# Altium PCB Seq.PcbDoc
Units mm, origin at the board's own origin, x right, y up, seen from the top; angles counter-clockwise.
Board outline 232.5 x 115 mm, 2 copper layers (Top Layer, Bottom Layer); 67 components, 53 nets, 354 pads, 0 vias.
Unrouted connection lines stored in the file: 177.
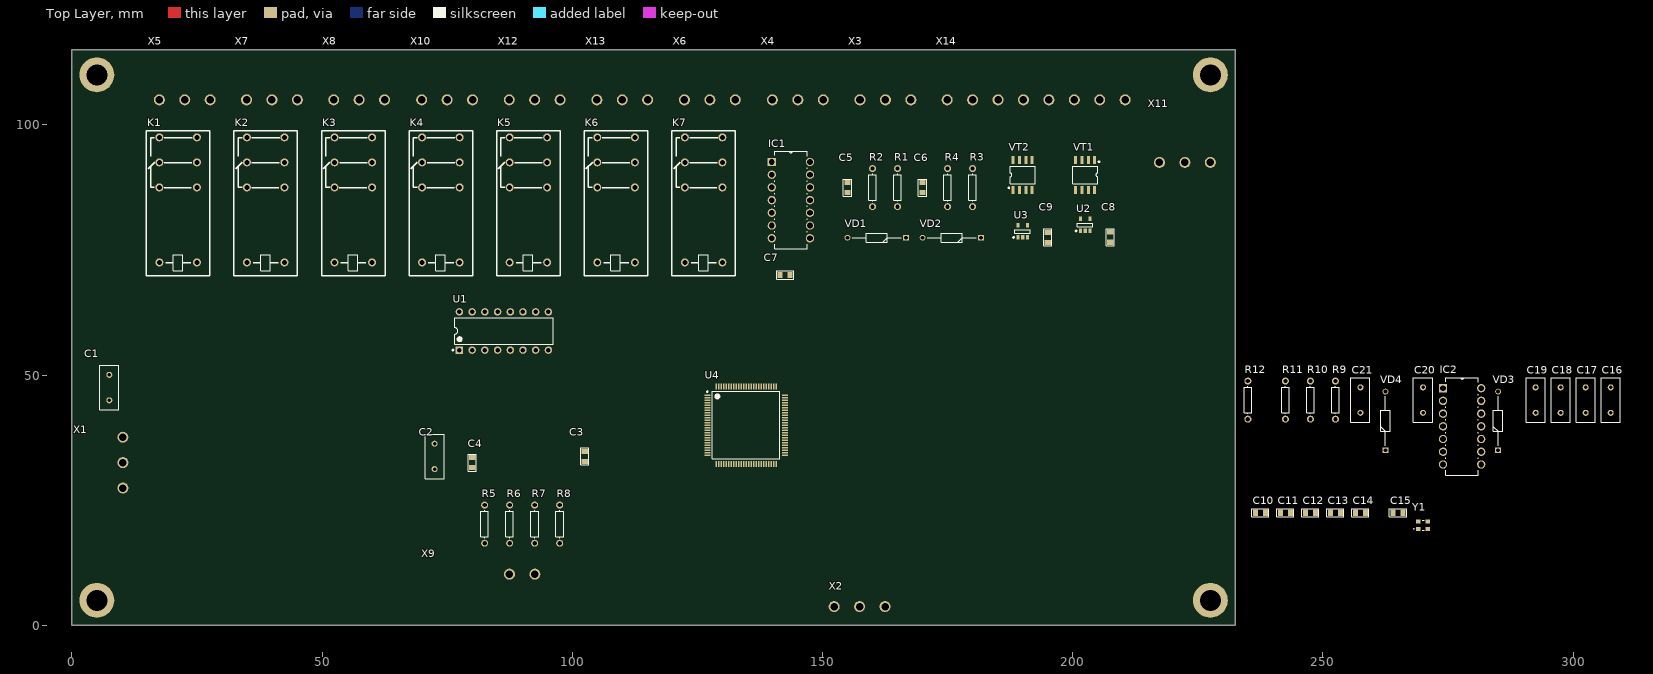
[diagram p0: Top Layer view]
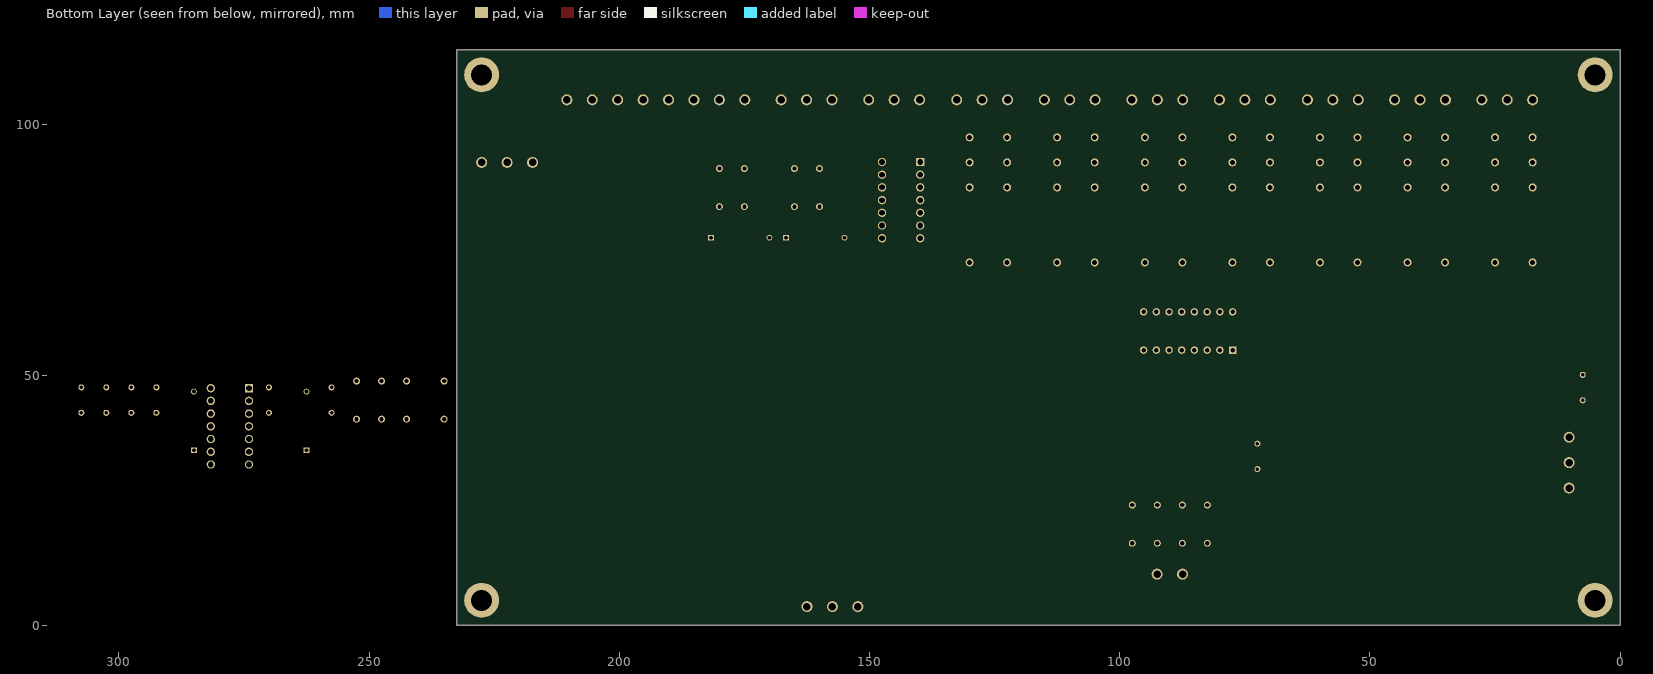
[diagram p1: Bottom Layer view, seen from below]

## Layer stack, top to bottom
Top Solder: solder mask 0.0102, Solder Resist, Dk 3.5
Top Layer: signal copper 0.0356
Dielectric 1: dielectric 0.32, FR-4, Dk 4.8
Bottom Layer: signal copper 0.0356
Bottom Solder: solder mask 0.0102, Solder Resist, Dk 3.5

## Board outline
0,0 232.5,0 232.5,115 0,115

## Design rules (kind name [scope] priority, off if disabled: settings)
Clearance [All] p1: gap=0.254 ignorepadtopadclearanceinfootprint=FALSE except(0: Arc-Hole Track-Hole SMDPad-Hole THPad-Hole Via-Hole Fill-Hole Poly-Hole Region-Hole Text-Hole)
PolygonConnect [All] p1: connectstyle=Direct reliefconductorwidth=0.254 reliefentries=4 polygonreliefangle="90 Angle" airgapwidth=0.254
RoutingVias [All] p1: holewidth=0.711 width=1.27 viastyle="Through Hole" minholewidth=0.711 minwidth=1.27 maxholewidth=0.711 maxwidth=1.27
SolderMaskExpansion [All] p1: expansion=0.102 istentingtop=FALSE
Width [All] p1: maxlimit=5 minlimit=0.1 preferedwidth=0.3
30 further rules are at their usual default settings.

## Classes and differential pairs
component class PTT_In: C16 C17 C18 C19 C20 C21 IC1 IC2 R1 R2 R3 R4 R5 R6 R7 R8 R9 R10 R11 R12 VD1 VD2 VD3 VD4 X12 X13 X14
component class MCU: C3 C4 C5 C6 C7 C8 C9 C10 C11 C12 C13 C14 C15 U4 Y1
component class Relay: C1 C2 K1 K2 K3 K4 K5 K6 K7 U1 U2 U3 VT1 VT2 X1 X2 X3 X4 X5 X6 X7 X8 X9 X10 X11

## Components (designator, comment, footprint, x,y, rotation, side; value= is the part's Value field where it differs from the comment)
C1 "Ceramic capacitor, 0.1μF, X7R, ±10%, 50V, 1206, -55...+125°C" RAD-0.2 7.5,47.5 r90 top value=0.1μF
C2 "Ceramic capacitor, 0.1μF, X7R, ±10%, 50V, 1206, -55...+125°C" RAD-0.2 72.5,33.75 r90 top value=0.1μF
C3 "Ceramic capacitor, 0.1 uF, X7R, ±10%, 16V, 0805, -55...+125°C" "CAP: 0805" 102.5,33.75 r270 top value="0.1 uF"
C4 "Ceramic capacitor, 10 uF, X7R, ±10%, 16V, 0805, -55...+125°C" "CAP: 0805" 80,32.5 r270 top value="10 uF"
C5 "Ceramic capacitor, 10 uF, X7R, ±10%, 16V, 0805, -55...+125°C" "CAP: 0805" 155,87.46 r90 top value="10 uF"
C6 "Ceramic capacitor, 0.1 uF, X7R, ±10%, 16V, 0805, -55...+125°C" "CAP: 0805" 170,87.46 r90 top value="0.1 uF"
C7 "Ceramic capacitor, 0.1μF, X7R, ±10%, 16V, 0805, -55...+125°C" "CAP: 0805" 142.54,70 r0 top value=0.1μF
C8 "Ceramic capacitor, 0.1μF, X7R, ±10%, 16V, 0805, -55...+125°C" "CAP: 0805" 207.5,77.54 r270 top value=0.1μF
C9 "Ceramic capacitor, 0.1μF, X7R, ±10%, 16V, 0805, -55...+125°C" "CAP: 0805" 195,77.5 r270 top value=0.1μF
C10 "Ceramic capacitor, 0.1μF, X7R, ±10%, 16V, 0805, -55...+125°C" "CAP: 0805" 237.5,22.5 r0 top value=0.1μF
C11 "Ceramic capacitor, 0.1μF, X7R, ±10%, 16V, 0805, -55...+125°C" "CAP: 0805" 242.5,22.5 r0 top value=0.1μF
C12 "Ceramic capacitor, 0.1μF, X7R, ±10%, 16V, 0805, -55...+125°C" "CAP: 0805" 247.5,22.5 r0 top value=0.1μF
C13 "Ceramic capacitor, 0.1μF, X7R, ±10%, 16V, 0805, -55...+125°C" "CAP: 0805" 252.5,22.5 r0 top value=0.1μF
C14 "Ceramic capacitor, 0.1μF, X7R, ±10%, 16V, 0805, -55...+125°C" "CAP: 0805" 257.5,22.5 r0 top value=0.1μF
C15 "Ceramic capacitor, 0.1μF, X7R, ±10%, 16V, 0805, -55...+125°C" "CAP: 0805" 265,22.5 r0 top value=0.1μF
C16 "Ceramic capacitor, 1μF, X7R, ±10%, 50V, 1206, -55...+125°C" RAD-0.2 307.5,45 r90 top value=1μF
C17 "Ceramic capacitor, 1μF, X7R, ±10%, 50V, 1206, -55...+125°C" RAD-0.2 302.5,45 r90 top value=1μF
C18 "Ceramic capacitor, 0.1μF, X7R, ±10%, 50V, 1206, -55...+125°C" RAD-0.2 297.5,45 r90 top value=0.1μF
C19 "Ceramic capacitor, 1μF, X7R, ±10%, 50V, 1206, -55...+125°C" RAD-0.2 292.5,45 r90 top value=1μF
C20 "Ceramic capacitor, 1μF, X7R, ±10%, 50V, 1206, -55...+125°C" RAD-0.2 270,45 r90 top value=1μF
C21 "Ceramic capacitor, 0.1μF, X7R, ±10%, 50V, 1206, -55...+125°C" RAD-0.2 257.5,45 r90 top value=0.1μF
IC1 "74HC14N,652" DIP254P762X420-14 147.5,77.34 r0 top
IC2 "74HC14N,652" DIP254P762X420-14 281.619,32.14 r0 top
K1 "Electromechanics relay, 3VDC, 125VAC, 2A, 2NO+2NC, -40...+85°C" R2G1CH012 21.25,84.35 r0 top
K2 "Electromechanics relay, 3VDC, 125VAC, 2A, 2NO+2NC, -40...+85°C" R2G1CH012 38.75,84.35 r0 top
K3 "Electromechanics relay, 3VDC, 125VAC, 2A, 2NO+2NC, -40...+85°C" R2G1CH012 56.25,84.35 r0 top
K4 "Electromechanics relay, 3VDC, 125VAC, 2A, 2NO+2NC, -40...+85°C" R2G1CH012 73.75,84.35 r0 top
K5 "Electromechanics relay, 3VDC, 125VAC, 2A, 2NO+2NC, -40...+85°C" R2G1CH012 91.25,84.35 r0 top
K6 "Electromechanics relay, 3VDC, 125VAC, 2A, 2NO+2NC, -40...+85°C" R2G1CH012 108.75,84.35 r0 top
K7 "Electromechanics relay, 3VDC, 125VAC, 2A, 2NO+2NC, -40...+85°C" R2G1CH012 126.25,84.35 r0 top
R1 "Resistor film, 51k, , 1206, 0.25W, -55...+125°C" AXIAL-0.3 165,87.46 r90 top value=51k
R2 "Resistor film, 22k, , 1206, 0.25W, -55...+125°C" AXIAL-0.3 160,87.46 r90 top value=22k
R3 "Resistor film, 51k, , 1206, 0.25W, -55...+125°C" AXIAL-0.3 180,87.46 r90 top value=51k
R4 "Resistor film, 22k, , 1206, 0.25W, -55...+125°C" AXIAL-0.3 175,87.46 r90 top value=22k
R5 "Resistor film, 51k, , 1206, 0.25W, -55...+125°C" AXIAL-0.3 82.5,20.21 r270 top value=51k
R6 "Resistor film, 22k, , 1206, 0.25W, -55...+125°C" AXIAL-0.3 87.5,20.21 r270 top value=22k
R7 "Resistor film, 51k, , 1206, 0.25W, -55...+125°C" AXIAL-0.3 92.5,20.21 r270 top value=51k
R8 "Resistor film, 22k, , 1206, 0.25W, -55...+125°C" AXIAL-0.3 97.5,20.21 r270 top value=22k
R9 "Resistor film, 220R, , 1206, 0.25W, -55...+125°C" AXIAL-0.3 252.5,45 r90 top value=220R
R10 "Resistor film, 220R, , 1206, 0.25W, -55...+125°C" AXIAL-0.3 247.5,45 r90 top value=220R
R11 "Resistor film, 220R, , 1206, 0.25W, -55...+125°C" AXIAL-0.3 242.5,45 r90 top value=220R
R12 "Resistor film, 220R, , 1206, 0.25W, -55...+125°C" AXIAL-0.3 235,45 r90 top value=220R
U1 "ULN2003A" STM-DIP-16L 86.35,58.81 r90 top
U2 "MCP1415T-E/OT" SOT-23-OT5_L 202.5,80 r90 top
U3 "MCP1415T-E/OT" SOT-23-OT5_L 190,78.7 r90 top
U4 "STM32F407VET6" STM-LQFP100_V 134.75,40 r0 top
VD1 "Single diode, 75V, 150mA, 1V, 4ns, SOD-323, -55...+150°C" DIOAD1165W56L425D185 166.7,77.46 r180 top
VD2 "Single diode, 75V, 150mA, 1V, 4ns, SOD-323, -55...+150°C" DIOAD1165W56L425D185 181.7,77.46 r180 top
VD3 "Single diode, 75V, 150mA, 1V, 4ns, SOD-323, -55...+150°C" DIOAD1165W56L425D185 285,35 r90 top
VD4 "Single diode, 75V, 150mA, 1V, 4ns, SOD-323, -55...+150°C" DIOAD1165W56L425D185 262.5,35 r90 top
VT1 "AO4405" SOIC-8 202.5,90 r180 top
VT2 "AO4405" SOIC-8 190,90 r0 top
X1 "Connector, 6pin, 2.54mm, 500VAC, 3A" 2EDGR-5.08-03P 10.21,32.5 r270 top
X2 "Connector, 6pin, 2.54mm, 500VAC, 3A" 2EDGR-5.08-03P 157.42,3.73 r0 top
X3 "Connector, 6pin, 2.54mm, 500VAC, 3A" 2EDGR-5.08-03P 162.58,105 r180 top
X4 "Connector, 6pin, 2.54mm, 500VAC, 3A" 2EDGR-5.08-03P 145.08,105 r180 top
X5 "Connector, 6pin, 2.54mm, 500VAC, 3A" 2EDGR-5.08-03P 22.58,105 r180 top
X6 "Connector, 6pin, 2.54mm, 500VAC, 3A" 2EDGR-5.08-03P 127.5,105 r180 top
X7 "Connector, 6pin, 2.54mm, 500VAC, 3A" 2EDGR-5.08-03P 40,105 r180 top
X8 "Connector, 6pin, 2.54mm, 500VAC, 3A" 2EDGR-5.08-03P 57.42,105 r180 top
X9 "Connector, 6pin, 2.54mm, 500VAC, 3A" 2EDGR-5.08-02P 90,10.21 r0 top
X10 "Connector, 6pin, 2.54mm, 500VAC, 3A" 2EDGR-5.08-03P 75,105 r180 top
X11 "Connector, 6pin, 2.54mm, 500VAC, 3A" 2EDGR-5.08-03P 222.42,92.5 r180 top
X12 "Connector, 6pin, 2.54mm, 500VAC, 3A" 2EDGR-5.08-03P 92.5,105 r180 top
X13 "Connector, 6pin, 2.54mm, 500VAC, 3A" 2EDGR-5.08-03P 110,105 r180 top
X14 "Connector, 6pin, 2.54mm, 500VAC, 3A" 2EDGR-5.08-08P 192.7,105 r180 top
Y1 "ECS-2520MVQ-260-CN-TR" ECS2520MVQ260CNTR 270,20 r0 top

## Footprints (in the part's own frame and the unit in brackets; to place one, negate y for a bottom-side part, rotate by r counter-clockwise, add the part's x,y. Pads: shape width x height; smd on the part's side, far side on the other; paste and mask are expansions set on the pad)
2EDGR-5.08-02P [mm]
  round 2.2 hole 1.5: 1(-2.54,0) 2(2.54,0)
  body extent -5.08,-9.81 5.08,2.19, height 9.05
2EDGR-5.08-03P [mm]
  round 2.2 hole 1.5: 1(-5.08,0) 2(0,0) 3(5.08,0)
  body extent -7.62,-9.9 7.62,2.1, height 9
2EDGR-5.08-08P [mm]
  round 2.2 hole 1.5: 1(-17.78,0) 2(-12.7,0) 3(-7.62,0) 4(-2.54,0) 5(2.54,0) 6(7.62,0) 7(12.7,0) 8(17.78,0)
  body extent -20.33,-9.89 20.31,2.11, height 9
AXIAL-0.3 [mm] "Axial Device, Thru-Hole; 2 Leads; 0.3 in Pin Spacing"
  round 1.4 hole 0.85: 1(-3.81,0) 2(3.81,0)
  silkscreen extent -2.77,-0.76 2.77,0.76
"CAP: 0805" [mm]
  rect 1x1.25 smd: 1(-1,0) 2(1,0)
  silkscreen extent -1.7,-0.82 1.7,0.82, body extent -1,-0.62 1,0.63, height 0.78
DIOAD1165W56L425D185 [mm]
  rect 1.15x1.15 hole 0.75: 1(0,0)
  round 1.15 hole 0.75: 2(11.7,0)
  silkscreen extent 0.92,-0.92 10.78,0.92
DIP254P762X420-14 [mil]
  rect 66x66 hole 44: 1(-300,600)
  round 66 hole 44: 2(-300,500) 3(-300,400) 4(-300,300) 5(-300,200) 6(-300,100) 7(-300,0) 8(0,0) 9(0,100) 10(0,200) 11(0,300) 12(0,400) 13(0,500) 14(0,600)
  silkscreen extent -278,-84 -22,684, body extent -332,-68 32,680, height 151
ECS2520MVQ260CNTR [mm]
  rect 0.9x0.8 smd: 1(-0.925,-0.725) 2(0.925,-0.725) 3(0.925,0.725) 4(-0.925,0.725)
  silkscreen extent -1.9,-1 0.2,1, body extent -1.25,-1 1.25,1, height 0.9
R2G1CH012 [mm]
  round 1.6 hole 1: 1(-3.75,-11.85) 2(3.75,-11.85) 3(-3.75,3.15) 3(3.75,3.15) 4(-3.75,8.15) 4(3.75,8.15) 5(-3.75,13.15) 5(3.75,13.15)
  silkscreen extent -6.35,-14.48 6.35,14.48, body extent -6.35,-14.5 6.35,14.5, height 15.74
RAD-0.2 [mm] "Radial Cap, Thru-Hole; 2 Leads; 0.2 in Pin Spacing"
  round 1.2 hole 0.7: 1(-2.54,0) 2(2.54,0)
  silkscreen extent -4.44,-1.91 4.44,1.91
SOIC-8 [mm] "4320.8-А Small Outline; 8 Leads; Body Width 3.9 mm; Pitch 1.27 mm"
  rect 0.6x1.6 smd: 1(-1.905,-3) 1(-0.635,-3) 1(0.635,-3) 2(1.905,-3) 3(-1.905,3) 3(-0.635,3) 3(0.635,3) 3(1.905,3)
  silkscreen extent -2.88,-2.72 2.5,1.75, body extent -2.5,-3.01 2.5,3.01, height 1.75
SOT-23-OT5_L [mm] "SOT23, 5-Leads, Body 2.9x1.7mm, Pitch 0.95mm, Lead Span 2.8mm, IPC High Density"
  rect 0.9x0.65 smd: 1(-1.2,0.95) 2(-1.2,0) 3(-1.2,-0.95) 4(1.2,-0.95) 5(1.2,0.95)
  silkscreen extent -1.32,-1.55 0.35,1.95, body extent -0.9,-1.55 0.9,1.55, height 1.45
STM-DIP-16L [mm] "DIP, 16-Leads, Body 19.7x7.1mm, Pitch 2.54mm"
  rect 1.5x1.5 hole 0.9: 1(-3.81,8.89)
  round 1.5 hole 0.9: 2(-3.81,6.35) 3(-3.81,3.81) 4(-3.81,1.27) 5(-3.81,-1.27) 6(-3.81,-3.81) 7(-3.81,-6.35) 8(-3.81,-8.89) 9(3.81,-8.89) 10(3.81,-6.35) 11(3.81,-3.81) 12(3.81,-1.27) 13(3.81,1.27) 14(3.81,3.81) 15(3.81,6.35) 16(3.81,8.89)
  silkscreen extent -3.93,-9.85 2.65,10.31, body extent -3.95,-9.85 3.95,9.85, height 5.33
STM-LQFP100_V [mm] "Thin QFP, 100-Leads, Body 14x14mm, Pitch 0.5mm, ST Recommended"
  rect 1.2x0.3 smd: 1(-7.75,6) 2(-7.75,5.5) 3(-7.75,5) 4(-7.75,4.5) 5(-7.75,4) 6(-7.75,3.5) 7(-7.75,3) 8(-7.75,2.5) 9(-7.75,2) 10(-7.75,1.5) 11(-7.75,1) 12(-7.75,0.5) 13(-7.75,0) 14(-7.75,-0.5) 15(-7.75,-1) 16(-7.75,-1.5) 17(-7.75,-2) 18(-7.75,-2.5) 19(-7.75,-3) 20(-7.75,-3.5) 21(-7.75,-4) 22(-7.75,-4.5) 23(-7.75,-5) 24(-7.75,-5.5) 25(-7.75,-6) 51(7.75,-6) 52(7.75,-5.5) 53(7.75,-5) 54(7.75,-4.5) 55(7.75,-4) 56(7.75,-3.5) 57(7.75,-3) 58(7.75,-2.5) 59(7.75,-2) 60(7.75,-1.5) 61(7.75,-1) 62(7.75,-0.5) 63(7.75,0) 64(7.75,0.5) 65(7.75,1) 66(7.75,1.5) 67(7.75,2) 68(7.75,2.5) 69(7.75,3) 70(7.75,3.5) 71(7.75,4) 72(7.75,4.5) 73(7.75,5) 74(7.75,5.5) 75(7.75,6)
  rect 0.3x1.2 smd: 26(-6,-7.75) 27(-5.5,-7.75) 28(-5,-7.75) 29(-4.5,-7.75) 30(-4,-7.75) 31(-3.5,-7.75) 32(-3,-7.75) 33(-2.5,-7.75) 34(-2,-7.75) 35(-1.5,-7.75) 36(-1,-7.75) 37(-0.5,-7.75) 38(0,-7.75) 39(0.5,-7.75) 40(1,-7.75) 41(1.5,-7.75) 42(2,-7.75) 43(2.5,-7.75) 44(3,-7.75) 45(3.5,-7.75) 46(4,-7.75) 47(4.5,-7.75) 48(5,-7.75) 49(5.5,-7.75) 50(6,-7.75) 76(6,7.75) 77(5.5,7.75) 78(5,7.75) 79(4.5,7.75) 80(4,7.75) 81(3.5,7.75) 82(3,7.75) 83(2.5,7.75) 84(2,7.75) 85(1.5,7.75) 86(1,7.75) 87(0.5,7.75) 88(0,7.75) 89(-0.5,7.75) 90(-1,7.75) 91(-1.5,7.75) 92(-2,7.75) 93(-2.5,7.75) 94(-3,7.75) 95(-3.5,7.75) 96(-4,7.75) 97(-4.5,7.75) 98(-5,7.75) 99(-5.5,7.75) 100(-6,7.75)
  silkscreen extent -7.87,-6.75 6.75,6.82, body extent -7,-7 7,7, height 1.6

## Part data
C1 C2 C16 C17 C18 C19 C20 C21: library part Ceramic_1206, Manufacturer=Yageo, Package=1206, PartNumber=CC1206KRX7R9BB104, Temperature=-55...+125°C, Tolerance=±10%, TypeCapacitor="Ceramic capacitor", TypeDielectric=X7R, Voltage=50V, HelpURL=https://www.digikey.com/product-detail/en/yageo/CC1206KRX7R9BB104/311-1179-1-ND/303089
  C1 C2 C18 C21: ValueManufacturerPartNumber="Ceramic capacitor, 0.1μF, X7R, ±10%, 50V, 1206, -55...+125°C"
  C16 C17 C19 C20: ValueManufacturerPartNumber="Ceramic capacitor, 1μF, X7R, ±10%, 50V, 1206, -55...+125°C"
C3 C4 C5 C6 C7 C8 C9 C10 C11 C12 C13 C14 C15: library part Ceramic_0805, Manufacturer=Yageo, Package=0805, PartNumber=CC0805KRX7R7BB104, Temperature=-55...+125°C, Tolerance=±10%, TypeCapacitor="Ceramic capacitor", TypeDielectric=X7R, Voltage=16V, HelpURL=https://www.digikey.com/product-detail/en/yageo/CC0805KRX7R7BB104/311-1142-1-ND/303052
  C3 C6: ValueManufacturerPartNumber="Ceramic capacitor, 0.1 uF, X7R, ±10%, 16V, 0805, -55...+125°C"
  C4 C5: ValueManufacturerPartNumber="Ceramic capacitor, 10 uF, X7R, ±10%, 16V, 0805, -55...+125°C"
  C7 C8 C9 C10 C11 C12 C13 C14 C15: ValueManufacturerPartNumber="Ceramic capacitor, 0.1μF, X7R, ±10%, 16V, 0805, -55...+125°C"
IC1 IC2: "Integrated Circuit", Manufacturer_Name=Nexperia, Arrow Part Number=74HC14N,652, Arrow Price/Stock=https://www.arrow.com/en/products/74hc14n652/nexperia, Manufacturer_Part_Number=74HC14N,652
K1 K2 K3 K4 K5 K6 K7: library part R2G1CH012, Manufacturer=Omron, MaxCurrent=2A, Package=2NO+2NC, Temperature=-40...+85°C, VoltageControlCoil=3VDC, VoltageMax=125VAC, HelpURL=https://www.digikey.com/product-detail/en/omron-electronics-inc-emc-div/G5V-2-DC3/Z2185-ND/369042, PartNumber=R2G1CH012, TypeRelay="Electromechanics relay", ValueManufacturerPartNumber="Electromechanics relay, 3VDC, 125VAC, 2A, 2NO+2NC, -40...+85°C"
R1 R2 R3 R4 R5 R6 R7 R8 R9 R10 R11 R12: library part Resistor_1206, Manufacturer=Yageo, Package=1206, PartNumber=RC1206JR-07100RL, Power=0.25W, Temperature=-55...+125°C, TypeResistor="Resistor film", HelpURL=https://www.digikey.com/product-detail/en/yageo/RC1206JR-07100RL/311-100ERCT-ND/732153
  R1 R3 R5 R7: ValueManufacturerPartNumber="Resistor film, 51k, , 1206, 0.25W, -55...+125°C"
  R2 R4 R6 R8: ValueManufacturerPartNumber="Resistor film, 22k, , 1206, 0.25W, -55...+125°C"
  R9 R10 R11 R12: ValueManufacturerPartNumber="Resistor film, 220R, , 1206, 0.25W, -55...+125°C"
U1: library part CMP-2000-07351-1, "Seven Darlington Array, 50 V, 0.5 A, -40 to 85 degC, 16-Pin DIP, RoHS, Tube", Collector Emitter Voltage V(br)ceo=50V, DC Collector Current=500mA, DC Current Gain hFE=1000hFE, Manufacturer=STMicroelectronics, Operating Temperature Max=85°C, Output Current=0.5A, Package Description="16-Pin DIP, Body 19.7 x 7.1 mm, Pitch 2.54 mm", Package Reference=DIP-16L, Power Dissipation Pd=-, Transistor Case Style=DIP, Automotive Qualification Standard=-, Datasheet URL=http://www2.st.com/content/ccc/resource/technical/document/datasheet/f3/6e/c8/64/4d/b3/4e/38/CD00001244.pdf/files/CD00001244.pdf/jcr:content/translations/en.CD00001244.pdf, Datasheet Version="Rev. 8, 06/2012", Manufacturer URL=http://www.st.com/, Mounting Technology=ThroughHole, MSL=MSL2-1year, No. of Pins=16Pins, PartNumber=ULN2003A, Product Range=-, SVHC=NoSVHC(17-Dec-2015), Transistor Polarity=NPN, VOUT=50V
U2 U3: library part CMP-0137-00407-1, "Tiny 1.5A, High-Speed Power MOSFET Driver, Inverting, Extended Temperature, Tape and Reel", Code_IPC=SOT23-5, DatasheetVersion="revC, Dec-2008", PackageDescription="5-Lead Plastic Small Outline Transistor (OT) [SOT-23]", PackageReference=SOT-23-OT5, PackageVersion="revBB, Aug-2009"
U4: library part CMP-0243-00016-3, "ARM Cortex-M4 32-bit MCU+FPU, 210 DMIPS, 512 kB Flash, 192 kB Internal RAM, 82 I/Os, 100-pin LQFP, -40 to 85 degC, Tray", I/Os (High Current)=82, Manufacturer=STMicroelectronics, Operating Frequency(F) (Processor speed) (MHz)=168, Supply Voltage(Vcc) max (V)=3.6, Supply Voltage(Vcc) min (V)=1.8, ComponentLink1Description="Manufacturer URL", ComponentLink1URL=http://www.st.com/web/en/home.html, ComponentLink2Description=Datasheet, ComponentLink2URL=http://www.st.com/st-web-ui/static/active/en/resource/technical/document/datasheet/DM00037051.pdf, ComponentLink3Description="Package Specification", ComponentLink3URL=http://www.st.com/st-web-ui/static/active/en/resource/technical/document/data_brief/DM00071938.pdf, Core="ARM Cortex-M4", D/A Converter=2x12-bit, DatasheetVersion="Rev. 4", FLASH Size (Prog) (kB)=512, Internal RAM Size (kB)=192, Mounting Technology="Surface Mount", PackageDescription="100-Pin Low Profile Quad Flat Package, 14 x 14 mm Body, 0.5 mm Pitch", PackageReference=LQFP100, PackageVersion="Rev. 1, 06/2013", Packing=Tray, PartNumber=STM32F407VET6
VD1 VD2 VD3 VD4: library part Diode_single, Current=150mA, Manufacturer="Micro Commercial", Package=SOD-323, PartNumber=1N4148WX-TP, Temperature=-55...+150°C, Voltage=75V, VoltageDrop=1V, HelpURL=https://www.digikey.com/product-detail/en/micro-commercial-co/1N4148WX-TP/1N4148WXTPMSCT-ND/717312, RecoveryTime=4ns, TypeDiode="Single diode", ValueManufacturerPartNumber="Single diode, 75V, 150mA, 1V, 4ns, SOD-323, -55...+150°C"
X1 X2 X3 X4 X5 X6 X7 X8 X10 X11 X12 X13: library part 2EDGR-5.08-03P, CurrentMax=3A, Manufacturer=Connfly, PartNumber=PBS-6, VoltageMax=500VAC, CommentText="\"Разъем\"", HelpURL=https://www.chipdip.ru/product/pbs-6, Multichannel=6pin, Pitch=2.54mm, TypeConnector=Connector, ValueManufacturerPartNumber="Connector, 6pin, 2.54mm, 500VAC, 3A"
X9: library part 2EDGR-5.08-02P, CurrentMax=3A, Manufacturer=Connfly, PartNumber=PBS-6, VoltageMax=500VAC, CommentText="\"Разъем\"", HelpURL=https://www.chipdip.ru/product/pbs-6, Multichannel=6pin, Pitch=2.54mm, TypeConnector=Connector, ValueManufacturerPartNumber="Connector, 6pin, 2.54mm, 500VAC, 3A"
X14: library part 2EDGR-5.08-08P, CurrentMax=3A, Manufacturer=Connfly, PartNumber=PBS-6, VoltageMax=500VAC, CommentText="\"Разъем\"", HelpURL=https://www.chipdip.ru/product/pbs-6, Multichannel=6pin, Pitch=2.54mm, TypeConnector=Connector, ValueManufacturerPartNumber="Connector, 6pin, 2.54mm, 500VAC, 3A"
Y1: "Crystal or Oscillator", Manufacturer_Name=ECS, Mouser Part Number=520-2520MVQ-260-CN-T, Arrow Part Number=ECS-2520MVQ-260-CN-TR, Arrow Price/Stock=https://www.arrow.com/en/products/ecs-2520mvq-260-cn-tr/ecs-international?region=nac, Datasheet Link=https://ecsxtal.com/store/pdf/ECS-2520MVQ.pdf, Height=0.9mm, Manufacturer_Part_Number=ECS-2520MVQ-260-CN-TR, Mouser Price/Stock=https://www.mouser.co.uk/ProductDetail/ECS/ECS-2520MVQ-260-CN-TR?qs=GedFDFLaBXEqI4jsvhzkaw%3D%3D
VT1 VT2: Published=24.11.2016, Publisher="Andrew Danich", Type="Сборка транзисторная"

## Free pads (board coordinates)
  round 7 hole 4.2: 2(5,5) 2(5,110) 2(227.5,5) 2(227.5,110)

## Nets (pads, with @x,y where several pads share a name; then routed paths per layer and width w, separated by ;. In a path a pad name is that pad's centre, name@x,y a point inside that pad or via, vN(x,y) a via of type N, cw(c..) or ccw(c..) an arc to the next point about the centre after c; other vN are vias at no path point)
+3V3: C3.2 C7.2 C8.2 C9.2 C10.2 C11.2 C12.2 C13.2 C14.2 C15.2 U4.6 U4.11 U4.19 U4.21 U4.22 U4.28 U4.50 U4.75 U4.100 Y1.1 Y1.4
+5: C1.2 C2.2 C18.2 C21.2 IC1.14 IC2.14 R1.2 R3.2 R5.2 R7.2 U2.2 U3.2 VT1.3
+12: K1.2 K2.2 K3.2 K4.2 K5.2 K6.2 K7.2 U1.9
GND: C1.1 C2.1 C3.1 C4.1 C5.1 C6.1 C7.1 C8.1 C9.1 C10.1 C11.1 C12.1 C13.1 C14.1 C15.1 C16.2 C17.2 C18.1 C19.2 C20.2 C21.1 IC1.7 IC2.7 U1.8 U2.4 U3.4 U4.10 U4.20 U4.27 U4.74 U4.94 U4.99 X4.3 X6.3 X9.2 X11.3 X12.3 X13.3 X14.2 X14.4 X14.6 X14.8 Y1.2
NetC4_2: C4.2 U4.73
NetC5_2: C5.2 U4.49
NetC6_2: C6.2 U4.14
NetC16_1: C16.1 IC1.1 R2.1 VD1.2
NetC17_1: C17.1 IC1.3 R4.1 VD2.2
NetC19_1: C19.1 IC2.1 R6.1 VD3.2
NetC20_1: C20.1 IC2.3 R8.1 VD4.2
NetK1_1: K1.1 U1.16
NetK1_3: K1.3 X1.1
NetK1_4: K1.4 X1.2
NetK1_5: K1.5 X1.3
NetK2_1: K2.1 U1.15
NetK2_3: K2.3 X2.1
NetK2_4: K2.4 X2.2
NetK2_5: K2.5 X2.3
NetK3_1: K3.1 U1.14
NetK3_3: K3.3 X3.1
NetK3_4: K3.4 X3.2
NetK3_5: K3.5 X3.3
NetK4_1: K4.1 U1.13
NetK4_3: K4.3 X5.1
NetK4_4: K4.4 X5.2
NetK4_5: K4.5 X5.3
NetK5_1: K5.1 U1.12
NetK5_3: K5.3 X7.1
NetK5_4: K5.4 X7.2
NetK5_5: K5.5 X7.3
NetK6_1: K6.1 U1.11
NetK6_3: K6.3 X8.1
NetK6_4: K6.4 X8.2
NetK6_5: K6.5 X8.3
NetK7_1: K7.1 U1.10
NetK7_3: K7.3 X10.1
NetK7_4: K7.4 X10.2
NetK7_5: K7.5 X10.3
NetR1_1: R1.1 R2.2 VD1.1 X12.1
NetR3_1: R3.1 R4.2 VD2.1 X12.2
NetR5_1: R5.1 R6.2 VD3.1 X13.1
NetR7_1: R7.1 R8.2 VD4.1 X13.2
NetR9_2: R9.2 X14.1
NetR10_2: R10.2 X14.3
NetR11_2: R11.2 X14.5
NetR12_2: R12.2 X14.7
NetU2_5: U2.5 VT1.2
NetU3_5: U3.5 VT2.2
NetU4_12: U4.12 Y1.3
NetVT1_1: VT1.1 X9.1
NetVT2_1: VT2.1 X11.2
NetVT2_3: VT2.3 X11.1
pads on no net: IC1.2 IC1.4 IC1.5 IC1.6 IC1.8 IC1.9 IC1.10 IC1.11 IC1.12 IC1.13 IC2.2 IC2.4 IC2.5 IC2.6 IC2.8 IC2.9 IC2.10 IC2.11 IC2.12 IC2.13 R9.1 R10.1 R11.1 R12.1 U1.1 U1.2 U1.3 U1.4 U1.5 U1.6 U1.7 U2.1 U2.3 U3.1 U3.3 U4.1 U4.2 U4.3 U4.4 U4.5 U4.7 U4.8 U4.9 U4.13 U4.15 U4.16 U4.17 U4.18 U4.23 U4.24 U4.25 U4.26 U4.29 U4.30 U4.31 U4.32 U4.33 U4.34 U4.35 U4.36 U4.37 U4.38 U4.39 U4.40 U4.41 U4.42 U4.43 U4.44 U4.45 U4.46 U4.47 U4.48 U4.51 U4.52 U4.53 U4.54 U4.55 U4.56 U4.57 U4.58 U4.59 U4.60 U4.61 U4.62 U4.63 U4.64 U4.65 U4.66 U4.67 U4.68 U4.69 U4.70 U4.71 U4.72 U4.76 U4.77 U4.78 U4.79 U4.80 U4.81 U4.82 U4.83 U4.84 U4.85 U4.86 U4.87 U4.88 U4.89 U4.90 U4.91 U4.92 U4.93 U4.95 U4.96 U4.97 U4.98 X4.1 X4.2 X6.1 X6.2